# Altium PCB PCB1.PcbDoc (part 3 of 3)
Units mil, origin at the board's own origin, x right, y up, seen from the top; angles counter-clockwise.
Board outline 2700 x 1000 mil, 4 copper layers (L1, L2, L3, L4), stack 61.583 mil thick; 64 components, 73 nets, 299 pads, 158 vias.
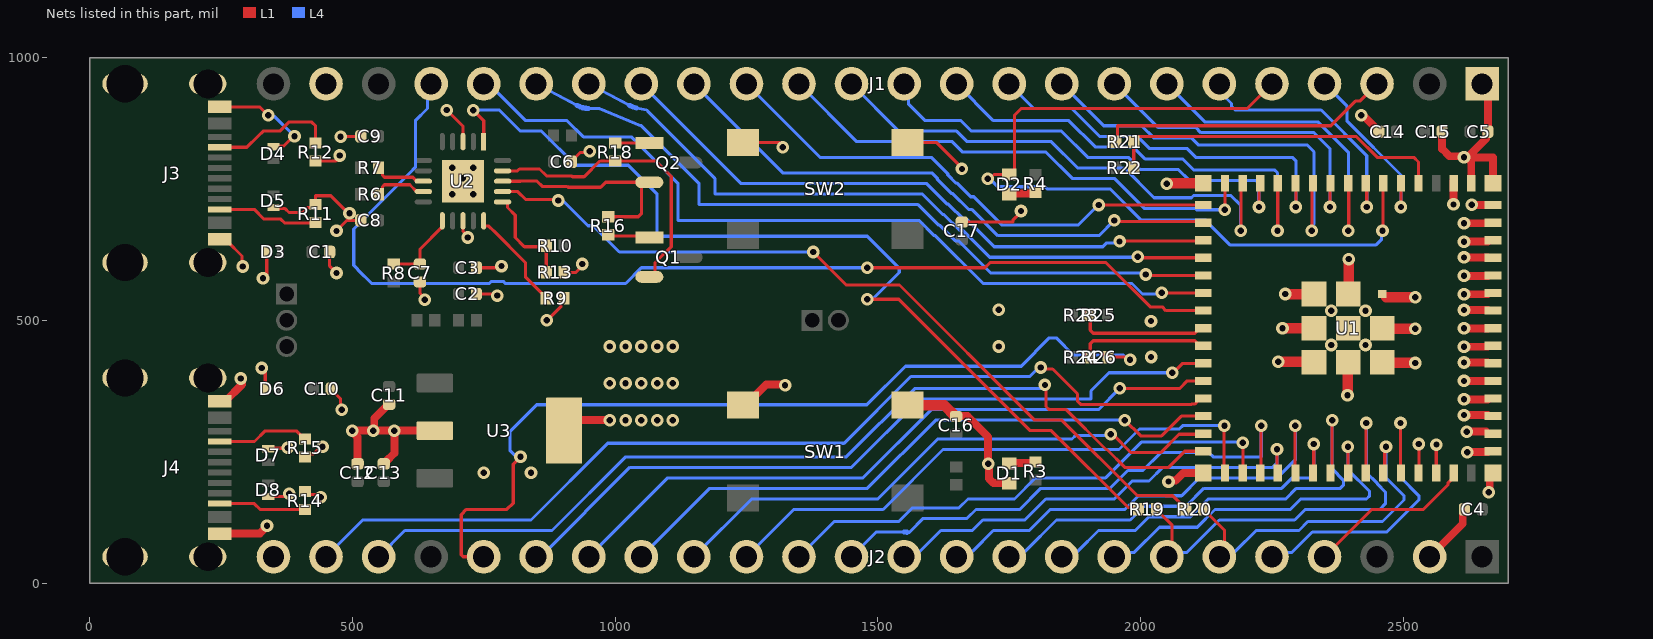
[diagram p4: the nets of this part, all layers, seen from the top]

## Via types
v1: diameter 24, hole 12, L1 to L4, tented both sides, 156 vias
v2: diameter 24/24/24 (per signal layer), hole 12, L1 to L4, tented both sides, 2 vias

## Nets (pads, with @x,y where several pads share a name; then routed paths per layer and width w, separated by ;. In a path a pad name is that pad's centre, name@x,y a point inside that pad or via, vN(x,y) a via of type N, cw(c..) or ccw(c..) an arc to the next point about the centre after c; other vN are vias at no path point) (continued)
CON_ESP_USB_P: J2.20 R26.1 | length 1698.7
  L1 w6.2: J2.20@750,50 710.73,50 707.1,53.63 707.1,130 717.1,140 794.29,140 806.24,151.95 806.24,226.24 v1(820,240) ; R26.1@1938.03,430 1970.18,430 1975.18,425 v1(1980,425)
  L4 w6.2: v1(820,240) 816.59,243.41 809.13,243.41 800,252.53 800,288.28 850.88,339.16 1479.16,339.16 1552.7,412.7 1772.7,412.7 1826.4,466.4 1839.57,466.4 1872.07,433.9 1967.47,433.9 1976.37,425 v1(1980,425)
CON_GPIO0: J1.3 R21.1 | length 558.5
  L1 w6: R21.1@1952.99,840 1955.86,842.87 1955.86,870 2361.82,870 2408.82,917 2417,917 J1.3@2450,950
DTR_FTDI: Q2.2 R16.1 U2.18 | length 416.1
  L1 w6: U2.18@786.04,764.59 819.68,764.59 820,764.9 851.11,764.9 861.17,754.84 908.69,754.84 910.53,753 972.42,753 982.02,762.6 Q2.2@1055.79,762.6 ; R16.1@986.7,696.88 1044.14,696.88 1050,702.73 1050,756.81 Q2.2@1055.79,762.6 ; Q2.2@1065.15,762.6 Q2.2@1055.79,762.6
ESP_USB_N: R23.2 R25.2 U1.23 | length 252
  L1 w6.2: R25.2@1902.99,510 R25.2@1903.5,509.49 ; R23.2@1904.02,510 1904.02,481.31 1910,475.33 2103.17,475.33 2106.8,478.96 2106.8,480.19 2111.57,484.96 U1.23@2119.45,484.96
ESP_USB_P: R24.2 R26.2 U1.24 | length 258.4
  L1 w6.2: R26.2@1911.55,437.53 R26.2@1904.02,430 1904.02,455.14 1910,461.13 2103.17,461.13 2106.8,457.5 2106.8,456.27 2111.57,451.5 U1.24@2119.45,451.5
FTDI_RESET: C7.2 R8.2 U2.11 | length 149.9
  L1 w6: R8.2@578.74,606.93 C7.2@628.74,606.93 628.74,635.35 671.26,677.87 U2.11@671.26,689.17
FTDI_USB_N: R6.2 U2.9 | length 102.1
  L1 w6: R6.2@550,740 557.63,747.63 557.63,754.49 561.14,758 609.4,758 609.91,757.49 622.5,744.9 U2.9@635.22,744.9
FTDI_USB_P: R7.2 U2.8 | length 99.8
  L1 w6: R7.2@550,790 557.63,782.37 557.63,775.51 561.14,772 609.91,772 615.2,772 622.61,764.59 U2.8@635.22,764.59
GND: C1.1 C2.1 C3.1 C4.1 C5.1 C6.1 C7.1 C8.1 C9.1 C10.1 C11.1 C12.1 C13.1 C14.1 C15.1 C16.1 C17.1 D1.1 D3.1 D4.1 D5.1 D6.1 D7.1 D8.1 J1.1 J1.23 J2.2 J2.24 J3.A1B12 J3.B1A12 J3.S1 J3.S2 J3.S3 J3.S4 J4.A1B12 J4.B1A12 J4.S1 J4.S2 J4.S3 J4.S4 R9.2 R11.1 R12.1 R13.2 R14.1 R15.1 SW1.3 SW1.4 SW2.3 SW2.4 U1.1 U1.2 U1.42 U1.43 U1.46 U1.47 U1.48 U1.49 U1.50 U1.51 U1.52 U1.53 U1.54 U1.55 U1.56 U1.57 U1.58 U1.59 U1.60 U1.61 U1.62 U1.63 U1.64 U1.65 U1.66 U1.67 U1.68 U1.69 U1.70 U1.71 U1.72 U1.73 U2.3 U2.13 U2.21 U3.2 U3.4 | length 4667.4
  L1 w6: J3.B1A12@247.64,653.94 247.64,652.36 250,650 262.4,650 290,622.4 v1@290,610 ; J3.A1B12@247.64,905.91 324.09,905.91 v1(340,890) ; v1@330,410 334.41,405.59 D6.1@334.41,370 ; v1(330,580) 337.2,587.2 D3.1@337.2,630 ; D8.1@340,164.41 370.62,164.41 376.21,170 v1(380,170) ; D7.1@340,255.59 340.76,256.35 376.35,256.35 v1(377.1,257.1) ; D5.1@350,714.41 351.89,712.52 372.13,712.52 379.64,705 405.36,705 414.73,714.37 424.37,714.37 R11.1@430,720 430,737.01 459.2,737.01 492.32,703.89 v1(494.67,703.89) ; D4.1@350,830 351.89,831.89 369.93,831.89 388.04,850 v1(390,850) ; R14.1@410,174.02 415.63,168.39 430.94,168.39 435.96,163.37 v1(439.75,163.37) ; R15.1@410,240 415.63,245.63 425.63,245.63 436.68,256.68 440.76,256.68 v1(443.44,259.36) ; R12.1@430,802.99 469.2,802.99 476.4,810.19 v1(476.4,813.6) ; C1.1@456.93,630 456.93,603.07 v1(470,590) ; C10.1@460,370 460,368.48 477.32,351.15 477.32,332.68 v1(480,330) ; v1(470,670) 490,690 C8.1@516.14,690 ; v1(477.69,849.24) v1@478.84,848.08 ; v1@480,850 C9.1@516.14,850 ; C7.1@628.74,573.07 628.74,551.26 v1@640,540 ; v1(680,900) 710.63,869.37 U2.3@710.63,840 ; U2.13@710.63,689.17 710.63,669.45 719.41,660.67 v1(719.41,657.43) ; C2.1@736.06,550 769.21,550 772.24,546.97 v1(776.03,546.97) ; C3.1@736.06,600 780.77,600 v1(783.89,603.11) ; v1(870,500) 870.98,500 897.36,526.39 897.36,536.02 R9.2@902.99,541.65 ; R13.2@902.99,591.65 903.82,590.83 925.42,590.83 935.07,600.47 935.07,604.32 v1(937.75,607) ; C6.1@916.85,801.65 916.85,802.49 933.53,819.18 949.18,819.18 v1(951.85,821.85) ; SW2.4@1243.5,838.58 1311.42,838.58 v1@1320,830 ; SW2.3@1556.5,838.58 1611.42,838.58 1660,790 v1(1660,788) ; C17.1@1660,686.93 1756.93,686.93 1756.93,690.44 1772.47,705.98 v2(1772.47,707.98) ; U1.42@2529.57,219.45 v1(2529.57,264.57) ; v1(2562.96,263.48) 2562.66,263.18 2562.66,220.12 2563.33,219.45 U1.43@2564.57,219.45
  L1 w15: J4.A1B12@247.64,346.06 258.46,346.06 290,377.6 v1@290,390 ; J4.B1A12@251.73,90 J4.B1A12@247.64,94.09 324.09,94.09 v1@340,110 ; C12.1@510,226.93 510,277.56 500,287.56 v1(500,290) v1(540,290) ; C13.1@560,226.93 561.18,226.93 564.31,230.06 564.31,231.24 580,246.93 v1(580,290) ; C11.1@570,340 568.82,340 541.72,312.9 541.72,291.72 v1(540,290) ; U3.2@656.97,290 v1(580,290) ; U3.4@920,290 920,300.02 929.98,310 v1(990,310) ; SW1.4@1243.5,338.58 1248.43,338.58 1287.73,377.89 1322.11,377.89 v1(1323.54,376.46) ; C16.1@1648.98,316.93 1649.52,317.47 1670.48,317.47 1710,277.95 v1(1710,227) 1711.21,225.79 1711.21,198.79 1720,190 D1.1@1750,190 ; v1(2053.08,193.08) 2054.8,194.8 2066.63,194.8 2081.2,209.37 U1.64@2119.45,209.37 ; v1(2420,890) 2421.72,888.28 2424.95,888.28 2449.94,863.29 2449.94,862.11 C14.1@2453.07,858.98 ; J2.2@2550,50 2613.01,113.01 2613.01,136.87 C4.1@2616.14,140 ; C15.1@2573.86,858.98 2573.86,826.14 2587.84,812.16 2613.71,812.16 v1(2615.43,810.43) 2617.16,812.16 2624,812.16 2657.66,845.82 2657.66,855.85 C5.1@2660.79,858.98 2660.79,939.21 J1.1@2650,950 ; v1(2595.43,720.43) U1.2@2595.43,765.55 ; v1(2615.43,319.57) U1.48@2660.55,319.57 ; v1(2615.43,349.57) U1.49@2660.55,349.57 ; v1(2615.43,384.57) U1.50@2660.55,384.57 ; v1(2615.43,419.57) U1.51@2660.55,419.57 ; v1(2615.43,449.57) U1.52@2660.55,449.57 ; v1(2615.43,484.57) U1.53@2660.55,484.57 ; v1(2615.43,519.57) U1.54@2660.55,519.57 ; v1(2615.43,549.57) U1.55@2660.55,549.57 ; v1(2615.43,584.57) U1.56@2660.55,584.57 ; v1(2615.43,619.57) U1.57@2660.55,619.57 ; v1(2615.43,649.57) U1.58@2660.55,649.57 ; v1(2615.43,684.57) U1.59@2660.55,684.57 ; v1(2620.71,288.07) 2657.05,288.07 U1.47@2660.55,284.57 ; v1(2621.88,249.12) 2622.32,249.57 U1.46@2660.55,249.57 ; U1.1@2629.29,760.55 2629.29,800.71 2620.63,809.37 2670.63,809.37 U1.62@2670.63,760.55 ; v1(2630,720) 2630.39,719.61 2669.31,719.61 U1.60@2669.35,719.57 ; v1(2662.71,172.71) 2664.43,174.43 2664.43,203.17 U1.65@2670.63,209.37 ; v1(540,290) v1(580,290)
  L1 w20: SW1.3@1556.5,338.58 1626.14,338.58 1647.8,316.93 C16.1@1648.98,316.93 ; v1(2050,760) 2050.28,760.28 2119.17,760.28 U1.63@2119.45,760.55 ; v1(2262.15,421.28) 2267.15,421.28 2267.23,421.2 U1.73@2317.23,421.2 ; v1(2270,485) 2275,485 2275.08,484.92 U1.72@2325.08,484.92 ; v1(2275,550) 2280,550 2280.08,549.92 U1.71@2330.08,549.92 ; v1(2393.72,357.15) 2393.72,362.15 2393.8,362.23 U1.70@2393.8,412.23 ; U1.69@2396.2,562.77 2396.2,612.77 2396.28,612.85 v1(2396.28,616.43) ; U1.68@2467.77,418.8 2517.77,418.8 2517.85,418.72 v1(2522.85,418.72) ; U1.67@2467.77,483.8 2517.77,483.8 2517.85,483.72 v1(2522.85,483.72) ; U1.66@2467.77,543.8 2517.77,543.8 2517.85,543.72 v1(2522.85,543.72)
  L4 w6: v1@340,886.21 v1(340,890) 342.68,887.32 352.68,887.32 v1(390,850)
  other v1: 337.69,109.24 750,210 840,210 1020,310 1050,310 1080,310 1110,310 990,380 1020,380 1050,380 1080,380 1110,380 287.69,389.24 327.69,409.24 2020,430 990,450 1020,450 1050,450 1080,450 1110,450 1730,450 2363,453 2428,453 2019.79,498.43 2363,518 2428,518 1730,520 637.69,539.24 291.64,602.27 690,740 730,740 710,770 690,790 730,790 1319.09,829.09
GPIO0: R21.2 R22.2 U1.4 | length 657.5
  L1 w6: R22.2@1987.01,790 R21.2@1987.01,840 1987.01,841.18 1992.64,846.81 1993.82,846.81 1997.01,850 2410,850 2450,810 2520,810 2528.9,801.1 U1.4@2528.9,760.55
GPIO1: J1.4 U1.5 | length 340.5
  L1 w6: v1@2495,715 v1(2495.43,715.43) U1.5@2495.43,760.55
  L4 w6: J1.4@2350,950 2393,907 2393,878.82 2495.43,776.38 v1(2495.43,715.43)
GPIO2: D2.1 J1.5 U1.6 | length 1584.7
  L1 w6: v1(1709.09,769.09) 1712.88,769.09 1721.19,777.4 1751.97,777.4 1758.78,784.21 1758.78,786.18 1760,787.4 1760,890 1773,903 2203,903 J1.5@2250,950 ; v1@2461.06,670 U1.6@2461.06,753.76
  L4 w6: v1(1709.09,769.09) 1712.88,769.09 1727.88,754.09 1817.75,754.09 1821.84,750 1941.72,750 2001.28,690.43 2124.14,690.43 2130,684.58 2130,683.43 2170,643.43 2448.12,643.43 2458.68,654 2458.68,668.68 v1(2460.43,670.43)
GPIO3: J1.6 U1.7 | length 491.6
  L1 w6: v1(2430.43,715.43) U1.7@2430.43,760.55
  L4 w6: J1.6@2150,950 2150,935.39 2172.93,912.46 2172.93,907.07 2180,900 2343.53,900 2430.43,813.1 v1(2430.43,715.43)
GPIO4: J1.7 U1.8 | length 632.5
  L1 w6: v1@2396.06,670 U1.8@2396.06,753.76
  L4 w6: J1.7@2050,950 2122.93,877.07 2338.18,877.07 2395.43,819.81 v1(2395.43,670.43)
GPIO5: J1.8 U1.9 | length 617.8
  L1 w6: v1(2360.43,715.43) U1.9@2360.43,760.55
  L4 w6: J1.8@1950,950 2033,867 2104.72,867 2114.64,857.07 2329.89,857.07 2360.43,826.53 v1(2360.43,715.43)
GPIO6: J1.9 U1.10 | length 769.3
  L1 w6: v1@2326.06,670 U1.10@2326.06,753.76
  L4 w6: J1.9@1850,950 1930,870 2001.72,870 2024.72,847 2096.43,847 2109.75,833.68 2316.68,833.68 2330,820.36 2330,683.29 2328.11,681.4 2328.11,673.11 v1(2325.43,670.43)
GPIO7: J1.10 U1.11 | length 739.4
  L1 w6: v1(2295.43,715.43) U1.11@2295.43,760.55
  L4 w6: J1.10@1750,950 1797,903 1868.72,903 1921.72,850 1993.43,850 2016.43,827 2088.15,827 2105.61,809.53 2289.58,809.53 2295.43,803.68 v1(2295.43,715.43)
GPIO8: J1.11 U1.12 | length 874.4
  L1 w6: v1@2261.06,670 U1.12@2261.06,753.76
  L4 w6: J1.11@1650,950 1720,880 1863.43,880 1913.43,830 1985.15,830 2008.15,807 2079.86,807 2100.65,786.21 2254.58,786.21 2260.43,780.36 v1(2260.43,670.43)
GPIO9: J1.12 U1.13 | length 861.3
  L1 w6: v1(2225.43,715.43) U1.13@2225.43,760.55
  L4 w6: J1.12@1550,950 1558.23,941.77 1558.23,911.77 1590,880 1658.28,880 1678.28,860 1849.47,860 1899.47,810 1976.86,810 1999.86,787 2071.58,787 2092.37,766.21 2219.14,766.21 2225,760.36 2225,715.87 v1(2225.43,715.43)
GPIO10: J1.13 U1.14 | length 971.9
  L1 w6: v2@2191.06,670 U1.14@2191.06,753.76
  L4 w6: J1.13@1450,950 1540,860 1650,860 1670,840 1830,840 1880,790 1968.58,790 2025.58,733 2096.38,733 2100.81,737.43 2171.62,737.43 2190.43,718.62 v2(2190.43,670.43)
GPIO11: J1.14 U1.15 | length 954.8
  L1 w6: v1(2160.43,710.43) U1.15@2160.43,755.55
  L4 w6: J1.14@1350,950 1460,840 1641.72,840 1661.72,820 1820,820 1870,770 1950,770 2007,713 2104.4,713 2106.96,710.43 v1(2160.43,710.43)
GPIO12: J1.15 U1.16 | length 998.1
  L1 w6: v1(1920.59,719.41) 1920.69,719.31 2119.35,719.31 U1.16@2119.45,719.21
  L4 w6: J1.15@1250,950 1390,810 1601.82,810 1633,778.82 1633,776.82 1648.82,761 1650.82,761 1676.82,735 1682.79,735 1736.81,680.98 1880.98,680.98 1919.41,719.41 v1(1920.59,719.41)
GPIO13: J1.16 U1.17 | length 1104.1
  L1 w6: v1(1950,690) 1952.13,687.87 2117.32,687.87 U1.17@2119.45,685.75
  L4 w6: J1.16@1150,950 1320,780 1603.53,780 1613,770.53 1613,768.53 1640.53,741 1642.53,741 1672.44,711.09 1678.41,711.09 1728.53,660.98 1920.98,660.98 v1(1950,690)
GPIO14: J1.17 U1.18 | length 1202.9
  L1 w6: v1(1960,650) 1961.14,651.14 2118.31,651.14 U1.18@2119.45,652.28
  L4 w6: J1.17@1050,950 1240,760 1593.25,760 1632.25,721 1634.25,721 1664.16,691.09 1670.13,691.09 1721.22,640 1928.28,640 1935.61,647.32 1957.32,647.32 v1(1960,650)
GPIO15: J1.18 U1.19 | length 1310.7
  L1 w6: v1@1998.82,618.82 U1.19@2119.45,618.82
  L4 w6: J1.18@950,950 1027.91,908.51 ; 1040.62,903.94 1060,900 1062.93,897.07 1190,770 1190,740 1584.96,740 1623.96,701 1625.96,701 1655.87,671.09 1661.84,671.09 1712.94,620 1993.57,620 v1(1994.54,620.98)
  L4 w10: 1027.91,908.51 ccw(c1050,950) 1040.62,903.94
GPIO16: J1.19 U1.20 | length 1428.5
  L1 w6: v1(2010,587) 2011.65,585.35 U1.20@2119.45,585.35
  L4 w6: J1.19@850,950 927.91,908.51 ; 949.64,903 969.61,902.85 1050,870 1052.93,867.07 1160,760 1160,720 1576.68,720 1615.68,681 1617.68,681 1647.59,651.09 1653.56,651.09 1714.65,590 1991.92,590 1992.25,589.68 2007.32,589.68 v1(2010,587)
  L4 w10: 927.91,908.51 ccw(c950,950) 949.64,903
GPIO17: J1.20 U1.21 | length 1574.5
  L1 w6: v1(2040,552.43) 2040.27,552.16 2116.31,552.16 U1.21@2116.57,551.89
  L4 w6: J1.20@750,950 760,950 830,880 908.58,880 939.73,848.85 1031.15,848.85 1120,760 1120,690 1578.4,690 1607.4,661 1609.4,661 1700.4,570 1983.64,570 2003.64,550 2037.57,550 v1(2040,552.43)
GPIO18: J1.21 U1.22 | length 2095.6
  L1 w6: v1(1480,600) 1703.72,600 1713.72,610 1933.65,610 2018.23,525.43 2041.18,525.43 2048.19,518.43 U1.22@2119.45,518.43
  L4 w6: J1.21@650,950 643.09,943.09 643.09,903 620,879.91 620,791.03 609.91,780.94 502.69,673.72 502.69,604.74 510.69,596.74 510.69,596.12 536.8,570 760.87,570 764.84,573.97 787.21,573.97 791.18,570 1020,570 1050,600 v1(1480,600)
GPIO21: J2.19 U1.25 | length 1442.4
  L1 w6: v1(2060,400) 2062.12,400 2080.15,418.03 U1.25@2119.45,418.03
  L4 w6: J2.19@858.05,58.05 J2.19@850,50 858.28,50 1028.28,220 1450,220 1580,350 1905.6,350 1905.6,365.6 1940,400 v1(2060,400)
GPIO26: J2.18 U1.26 | length 1308.4
  L1 w6: v1(1960.39,370.39) 1960.78,370 2074.13,370 2088.7,384.57 U1.26@2119.45,384.57
  L4 w6: J2.18@950,50 1100,200 1471.72,200 1601.72,330 1920,330 v1(1960.39,370.39)
GPIO33: J2.17 U1.28 | length 1205.2
  L1 w6: v1(1970,310) 2000,280 2040,280 2077.64,317.64 U1.28@2119.45,317.64
  L4 w6: J2.17@1050,50 1180,180 1480,180 1610,310 v1(1970,310)
GPIO34: J2.16 U1.29 | length 1095.3
  L1 w6: v1(1943.47,283) 1947,283 1981.86,248.14 2038.14,248.14 2073,283 2118.28,283 U1.29@2119.45,284.17
  L4 w6: J2.16@1150,50 1260,160 1500,160 1614,274 1869.47,274 1876.47,281 1941.47,281 v1(1943.47,283)
GPIO35: J2.15 U1.31 | length 1096.7
  L1 w6: U1.31@2158.94,216.24 v1@2158.94,300
  L4 w6: J2.15@1250,50 1340,140 1510,140 1624,254 1959.05,254 1998.05,293 2073.63,293 2080.2,299.57 v1(2159.57,299.57)
GPIO36: J2.14 U1.32 | length 992.9
  L1 w6: U1.32@2194.57,209.45 v1(2194.57,267)
  L4 w6: J2.14@1350,50 1417,117 1540,117 1566,143 1654.5,143 1671.5,160 1760,160 1800,200 1933.43,200 2001.57,268.14 2193.42,268.14 v1(2194.57,267)
GPIO37: J2.13 U1.33 | length 1008.1
  L1 w6: U1.33@2228.94,216.24 v1@2228.94,300
  L4 w6: J2.13@1450,50 1497,97 1550,97 ; 1555.51,96.68 1560.21,96.68 1586.54,123 1669.77,123 1686.77,140 1770,140 1810,180 1941.72,180 1975.86,214.14 2004.14,214.14 2038.14,248.14 2129.81,248.14 2137.95,240 2228.94,240 2229.57,240.62 v1(2229.57,299.57)
  L4 w10: 1550,97 cw(c1550,50) 1555.51,96.68
GPIO38: J2.12 U1.34 | length 855.1
  L1 w6: U1.34@2259.57,209.45 v1(2259.57,254.57)
  L4 w6: J2.12@1550,50 1560.33,60.33 1580.33,60.33 1620,100 1680,100 1700,120 1779.9,120 1819.9,160 1950,160 1984.14,194.14 2015.96,194.14 2041.9,220.08 2129.59,220.08 2129.67,220 2251.72,220 2259.28,227.57 2259.28,254.28 v1(2259.57,254.57)
GPIO39: J2.11 U1.35 | length 869.8
  L1 w6: U1.35@2293.94,216.24 v1@2293.94,300
  L4 w6: J2.11@1650,50 1660.33,60.33 1680.33,60.33 1720,100 1788.18,100 1828.18,140 1970,140 1996.08,166.08 2078.15,166.08 2112.07,200 2260,200 2294.57,234.57 v1(2294.57,299.57)
GPIO40: J2.10 U1.36 | length 748
  L1 w6: U1.36@2329.57,219.45 v1(2329.57,264.57)
  L4 w6: J2.10@1750,50 1760.33,60.33 1780.33,60.33 1840,120 1980,120 2006.08,146.08 2086.44,146.08 2120.36,180 2268.28,180 2288.28,200 2323.71,200 2329.57,205.86 v1(2329.57,264.57)
GPIO41: J2.9 U1.37 | length 808.4
  L1 w6: 2363.94,226.24 v1@2363.94,310
  L4 w6: J2.9@1850,50 1860.33,60.33 1880.33,60.33 1920,100 1990,100 2016.08,126.08 2094.72,126.08 2128.64,160 2276.57,160 2296.57,180 2380,180 2385.86,185.86 2385.86,195.86 2364.57,217.15 v1(2364.57,309.57)
GPIO42: J2.8 U1.38 | length 689.8
  L1 w6: U1.38@2394.57,214.45 v1(2394.57,259.57)
  L4 w6: J2.8@1950,50 1958.23,58.23 1988.23,58.23 2036.08,106.08 2107.8,106.08 2141.72,140 2284.85,140 2304.85,160 2430,160 2435.86,165.86 2435.86,174.14 2394.57,215.43 v1(2394.57,259.57)
GPIO45: J2.5 U1.41 | length 569.8
  L1 w6: U1.41@2493.94,221.24 2494.57,221.86 2494.57,304.38 v1@2493.94,305
  L4 w6: J2.5@2250,50 2258.23,58.23 2288.23,58.23 2327,97 2468.72,97 2529.64,157.93 2529.64,166.21 2494.57,201.29 v1(2494.57,304.57)
GPIO46: J2.4 U1.44 | length 318.5
  L1 w6: J2.4@2350,50 2440,140 2537.83,140 2585.24,187.41 2585.24,190.91 2595.83,201.5 U1.44@2595.83,209.37
GPIO47: J2.23 U1.27 | length 1861.6
  L1 w6: v1(1809.99,410.04) 1812.67,407.36 1832.64,407.36 1880,360 1880,345.86 1885.86,340 2096.98,340 2097.49,340.51 2102.84,340.51 2108.7,346.37 2108.7,348.23 2111.57,351.1 U1.27@2119.45,351.1
  L4 w6: J2.23@450,50 520,120 840,120 985.86,265.86 1435.86,265.86 1563,393 1789.21,393 1806.25,410.04 v1(1809.99,410.04)
GPIO48: J2.22 U1.30 | length 1805.5
  L1 w6: v1(1818,377) 1820,375 1820,335.86 1825.86,330 1858.28,330 1934.28,254 1936,254 1969.92,220.08 2053.35,220.08 2083.98,250.71 U1.30@2119.45,250.71
  L4 w6: J2.22@550,50 600,100 880,100 1020,240 1440,240 1570,370 1809.21,370 1816.21,377 v1(1818,377)
NetD1_2: D1.2 R3.1 | length 51.1
  L1 w15: D1.2@1750,227.4 1751.3,228.7 1798.7,228.7 R3.1@1800,230
NetD2_2: D2.2 R4.1 | length 51.2
  L1 w15: D2.2@1750,740 1751.5,741.5 1798.5,741.5 R4.1@1800,742.99
NetJ3_A5: J3.A5 R12.2 | length 247.2
  L1 w6: J3.A5@247.64,829.13 299.37,829.13 320,849.76 330.24,860 361.82,860 378.82,877 423,877 430,870 R12.2@430,837.01 428.82,837.01 R12.2@423.19,842.64
NetJ3_B5: J3.B5 R11.2 | length 193.5
  L1 w6: J3.B5@247.64,711.02 313.47,711.02 331.98,692.52 363.84,692.52 371.36,685 429.02,685 R11.2@430,685.98
NetJ4_A5: J4.A5 R15.2 | length 177.2
  L1 w6: J4.A5@247.64,269.29 313.79,269.29 334.06,289.57 393.27,289.57 408.82,274.02 R15.2@410,274.02
NetJ4_B5: J4.B5 R14.2 | length 167
  L1 w6: J4.B5@247.64,151.18 313.31,151.18 324.5,140 R14.2@410,140
NetQ1_1: Q1.1 R16.2 | length 96.2
  L1 w6: R16.2@986.7,662.86 989.43,660.13 1062.42,660.13 Q1.1@1065.15,657.4 Q1.1@1049.7,657.4
NetQ2_1: Q2.1 R18.2 | length 65.3
  L1 w6: R18.2@1000,837.01 1000.2,837.2 1064.96,837.2 Q2.1@1065.15,837.4
NetR9_1: R9.1 U2.15 | length 202.5
  L1 w6: U2.15@749.91,689.09 749.91,679.29 750.14,679.06 759.93,679.06 769.09,669.91 ; 769.17,670 829.32,609.85 829.32,582.49 868.98,542.83 R9.1@868.98,541.65
RTS_FTDI: Q1.2 R18.1 U2.19 | length 564.2
  L1 w6: U2.19@786.04,784.27 814.27,784.27 817.96,787.96 820,787.96 856.34,787.96 869.45,774.84 916.97,774.84 918.82,773 941.18,773 971.18,802.99 R18.1@1000,802.99 1077.35,802.99 1106.87,773.48 1106.87,639.93 1075.8,608.86 1075.8,588.38 1070.02,582.6 Q1.2@1065.15,582.6
RXD_FTDI: R19.2 U2.1 | length 1810.9
  L1 w6: v1(729.94,899.86) 750,879.81 U2.1@750,851.53 ; v1(1480,540) 1540,540 1790,290 1830,290 1976.21,143.79 1992.2,143.79 R19.2@1995.98,140
  L4 w6: v1(729.94,899.86) 780.14,899.86 800.09,879.91 820,860 860,860 925.15,794.85 1025.15,794.85 1080,740 1080,660 1480,660 1540.86,599.14 1540.86,590.86 1492.68,542.68 1482.68,542.68 v1(1480,540)
TXD_FTDI: R20.2 U2.17 | length 1551.2
  L1 w6: U2.17@786.04,744.9 815.1,744.9 830.43,729.57 890.27,729.57 v1(892,727.84) ; v1(1377,630) 1440,567 1541.28,567 1798.28,310 1850,310 1993.19,166.81 2046.84,166.81 2047.57,166.08 2061.08,166.08 2085.98,141.18 R20.2@2085.98,140
  L4 w6: v1(892,727.84) 900.34,727.84 948.45,679.74 958.55,679.74 1008.28,630 v1(1377,630)
U0RXD: J2.6 R20.1 U1.40 | length 671.5
  L1 w6: R20.1@2120,140 2120,138.82 2125.63,133.19 2126.81,133.19 2160,100 2160,60 J2.6@2150,50 ; U1.40@2459.57,214.45 2464.48,219.37 2464.48,257.05 v1(2467,259.57)
  L4 w6: J2.6@2150,50 2160.33,60.33 2180.33,60.33 2220,100 2301.42,100 2318.42,117 2460.43,117 2501.36,157.93 2501.36,166.21 2467,200.57 v1(2467,259.57)
U0TXD: J2.7 R19.1 U1.39 | length 817.5
  L1 w6: R19.1@2030,140 2030,138.82 2035.63,133.19 2036.81,133.19 2060,110 2060,60 J2.7@2050,50 ; U1.39@2428.94,221.24 v1@2428.94,305
  L4 w6: J2.7@2050,50 2058.23,58.23 2088.23,58.23 2150,120 2293.14,120 2313.14,140 2455.15,140 2465.86,150.71 2465.86,173.28 2450,189.14 2450,190 2430,210 2430,252.42 2429.57,252.85 v1(2429.57,304.57)
VBUS_SENSE: R10.1 R13.1 U2.16 | length 199.9
  L1 w6: U2.16@786.04,725.22 795.21,725.22 795.43,724.99 795.43,714.57 810,700 810,657.46 827.46,640 867.32,640 R10.1@868.98,641.65 R13.1@868.98,591.65
pads on no net: J1.24 J3.A8 J3.B8 J4.A8 J4.B8 U2.2 U2.4 U2.5 U2.6 U2.7 U2.14

## Polygon pours and split planes (outlines as drawn)
GND on L1 "GND_L01_P012" (solid, pour order 12): 476.13,345 540,345 540,350 580,350 580,325 790,325 790,405 970,405 970,225 870,225 870,275 690,275 690,255 512.75,255 510,252.25 510,280 476.13,280
GND on L1 "GND_L01_P010" (solid, pour order 10): 2250,630 2535,630 2535,345 2250,345
+5V_VBUS2 on L1 "+5V_VBUS2_L01_P009" (solid, pour order 9): 360,465 355,465 390,465 390,450 435,405 435,310 355,310 355,315 355,465 375,465
+5V_VBUS1 on L1 "+5V_VBUS1_L01_P008" (solid, pour order 8): 355,530 355,640.1 356.02,641.13 357.15,640 430,640 430,531.8 430.5,531.3
+5V on L1 "+5V_L01_P007" (solid, pour order 7): 710,410 710,360 620,360 600,360 600,370 530,370 430,470 430,490 360,490 360,520 440,520 550,410
+3V3_REG on L1 "+3V3_REG_L01_P005" (solid, pour order 5): 670.65,196.45 670.65,118.77 491.72,118.77 491.72,200.17
+3V3_FTDI on L1 "+3V3_FTDI_L01_P003" (solid, pour order 3): 605.22,725.22 584.04,725.22 550,691.18 537.52,663.45 516.38,642.31 516.38,619.75 516.38,570 560,570 550,580 550,630 560,640 603.65,640 604.79,701.83
+3V3_FTDI on L1 "+3V3_FTDI_L01_P001" (solid, pour order 1): 890,860 890,800 880,810 830,810 830,860
GND on L1 "GND_L01_P000" (solid, pour order 0): 970,470 970,290 1140,290 1140,470
GND on L2 "GND_L02_P015" (solid, remove dead copper, pour order 15): 25,980 25,20 2680,20 2680,985 2675,980
+3V3 on L2 "+3V3_L02_P013" (solid, pour order 13): 2680,20 2680,985 925,985 920,990 920,860 1170,860 1345,685 1510,685 1520,675 1645,800 1680,800 1690,810 2535,810 2535,285 2415,165 2415,160 2315,160 2305,150 2305,20
+3V3 on L2 "+3V3_L02_P014" (solid, pour order 14): 1405,424.82 1445,424.82 1445,735 1405,735
GND on L3 (split plane): 2679.9,20.1 20.1,20.1 20.1,979.9 2679.9,979.9

## Silkscreen, mask and mechanical layers (free items; w line width, h text height)
Top Overlay:
  lines w6: 750,95 750,115 ; 750.27,878.1 750.27,898.1 ; 1250,95 1250,115 ; 1250,885 1250,905 ; 1750,95 1750,115 ; 1750,885 1750,905 ; 2250,95 2250,115 ; 2250,885 2250,905
  lines w10: 292.92,902.14 2660.79,906.27 ; 292.92,906.1 292.92,928.05 292.92,971.95 292.92,993.9 ; 292.92,1000 2700,1000 2700,926.88 ; 2650,95 300,97.31 300,37.5 300,0 2698.11,0 ; 2699.05,64.95 2699.05,0.95 ; 2698.11,0 2699.05,0.95 ; 2698.11,0 2699.05,0.95
  text "J1" at 2316,826 h40
  text "USER" at 1718.88,659.07 h40
  text "BOOT/USR" at 1246.72,566 h40
  text "USB1" at 420,528 h40
  text "UART" at 26,526 h40
  text "+5V" at 206,476 h40
  text "REG" at 1206,476 h40
  text "3V3" at 1486,476 h40
  text "ESP" at 26,436 h40
  text "USB2" at 420,426 h40
  text "RESET" at 1306.7,386 h40
  text "POWER" at 1706,266 h40
  text "J2" at 2316,126 h40
Bottom Overlay:
  text "NC" at 370,869 h40 r90
  text "GND" at 470,869 h40 r90
  text "5V" at 570,869 h40 r90
  text "IO18" at 670,869 h40 r90
  text "IO17" at 770,869 h40 r90
  text "IO16" at 870,869 h40 r90
  text "IO15" at 970,869 h40 r90
  text "IO14" at 1070,869 h40 r90
  text "IO13" at 1170,869 h40 r90
  text "IO12" at 1270,869 h40 r90
  text "IO11" at 1370,869 h40 r90
  text "IO10" at 1470,869 h40 r90
  text "IO9" at 1570,869 h40 r90
  text "IO8" at 1670,869 h40 r90
  text "IO7" at 1770,869 h40 r90
  text "IO6" at 1870,869 h40 r90
  text "IO5" at 1970,869 h40 r90
  text "IO4" at 2070,869 h40 r90
  text "IO3" at 2170,869 h40 r90
  text "IO2" at 2270,869 h40 r90
  text "IO1" at 2370,869 h40 r90
  text "IO0" at 2470,869 h40 r90
  text "3V3" at 2570,869 h40 r90
  text "GND" at 2670,869 h40 r90
  text "<---PIN1--->" at 2670,732 h40 r90
  text "USB-" at 674,264 h40 r90
  text "USB+" at 774,264 h40 r90
  text "GND" at 370,255 h40 r90
  text "IO47" at 470,255 h40 r90
  text "IO48" at 570,255 h40 r90
  text "IO21" at 870,255 h40 r90
  text "IO26" at 970,255 h40 r90
  text "IO33" at 1070,255 h40 r90
  text "IO34" at 1170,255 h40 r90
  text "IO35" at 1270,255 h40 r90
  text "IO36" at 1370,255 h40 r90
  text "IO37" at 1470,255 h40 r90
  text "IO38" at 1570,255 h40 r90
  text "IO39" at 1670,255 h40 r90
  text "IO40" at 1770,255 h40 r90
  text "IO41" at 1870,255 h40 r90
  text "IO42" at 1970,255 h40 r90
  text "TXD" at 2070,255 h40 r90
  text "RXD" at 2170,255 h40 r90
  text "IO45" at 2270,255 h40 r90
  text "IO46" at 2370,255 h40 r90
  text "EN" at 2470,255 h40 r90
  text "GND" at 2570,255 h40 r90
  text "3V3" at 2670,255 h40 r90
Board Shape:
  the board outline again, w10

## Text inside footprints (layer, text, board x,y; h text height)
J1: Bottom Overlay "1" at 2636,1026 h40 r270
J2: Bottom Overlay "1" at 2627,-34 h40 r270
J5: Drill Drawing "1" at 301,531 h40
J6: Drill Drawing "1" at 1404.86,436 h40 r90